# Altium PCB HighPowerBoard_v2.PcbDoc
Units mm, origin at the board's own origin, x right, y up, seen from the top; angles counter-clockwise.
Board outline 76.2 x 52.07 mm, 2 copper layers (Top Layer, Bottom Layer); 27 components, 11 nets, 63 pads, 29 vias.
Unrouted connection lines stored in the file: 16.
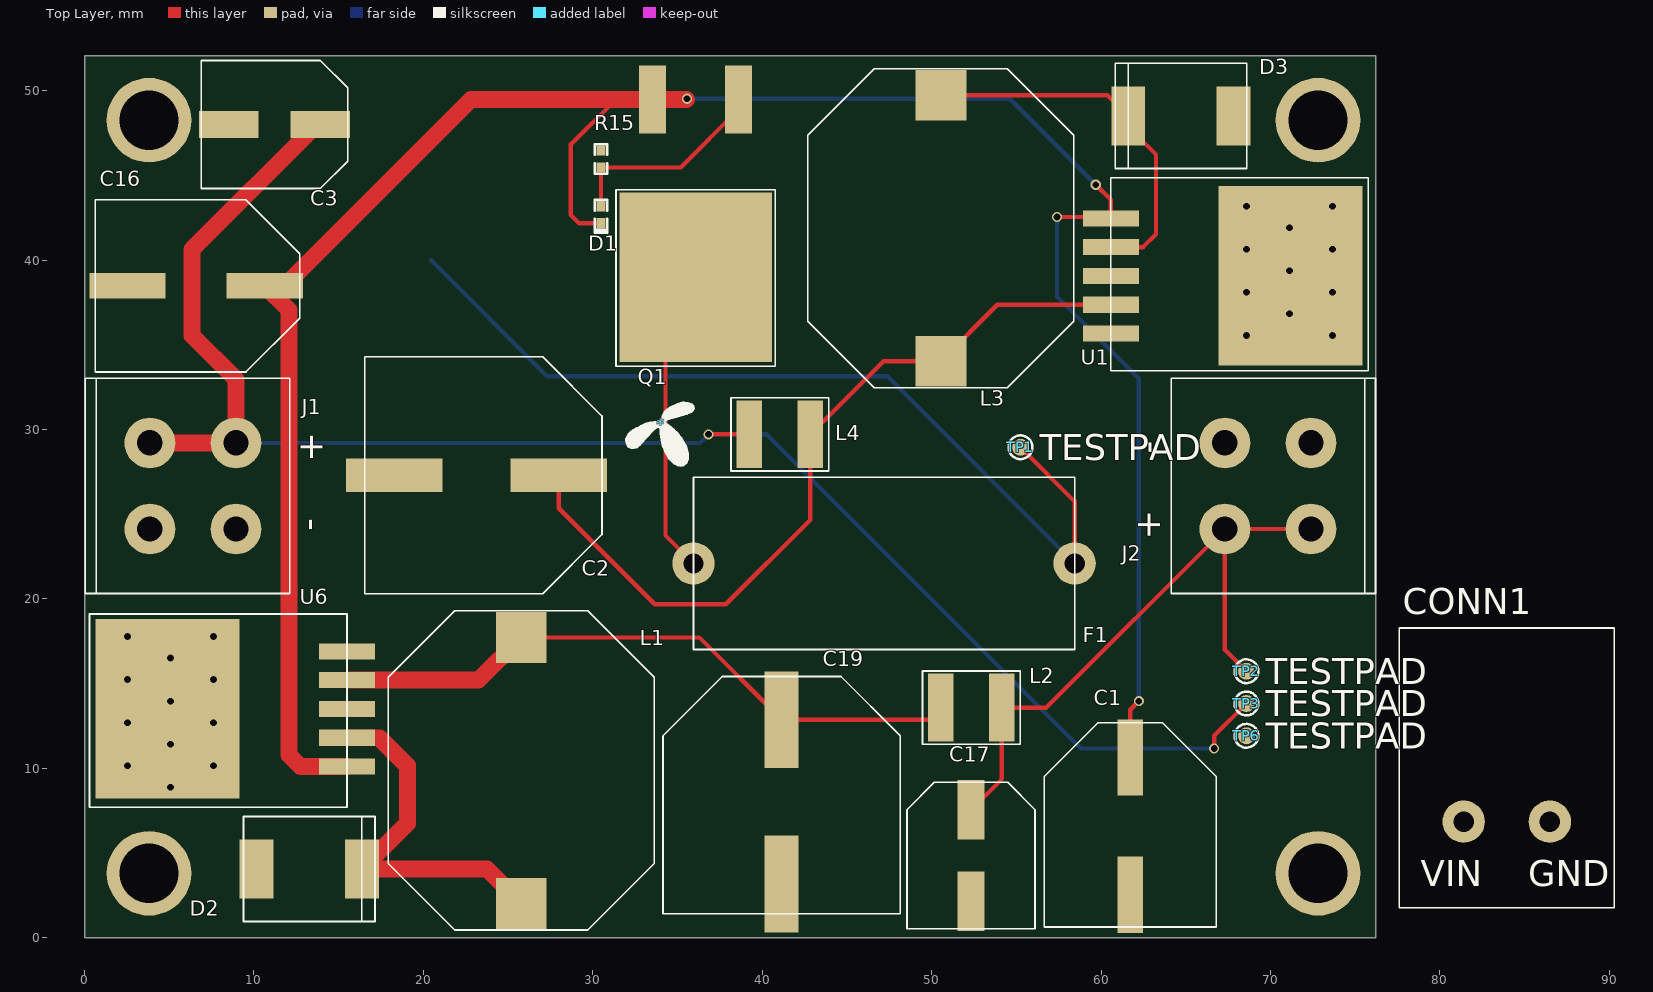
[diagram p0: Top Layer view]
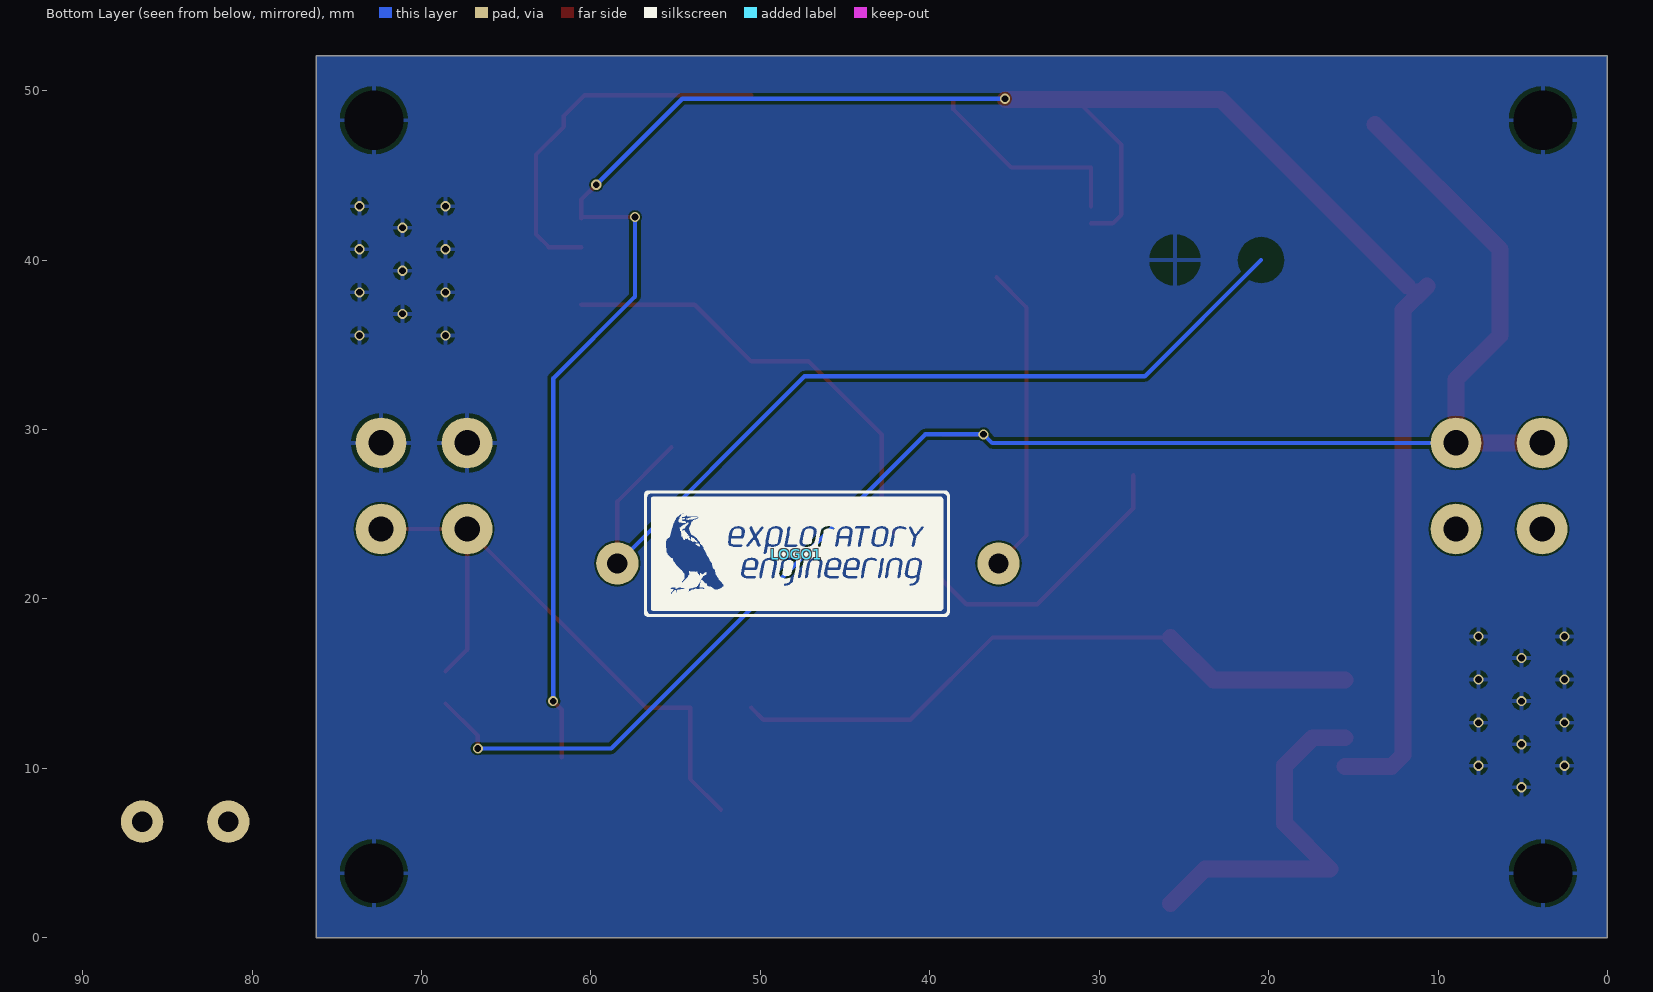
[diagram p1: Bottom Layer view, seen from below]

## Layer stack, top to bottom
Top Solder: solder mask 0.0102, Solder Resist, Dk 3.5
Top Layer: signal copper 0.0356
Dielectric 1: dielectric 0.32, FR-4, Dk 4.8
Bottom Layer: signal copper 0.0356
Bottom Solder: solder mask 0.0102, Solder Resist, Dk 3.5

## Board outline
0,0 76.2,0 76.2,52.07 0,52.07

## Design rules (kind name [scope] priority, off if disabled: settings)
Clearance [All] p1: gap=0.1 ignorepadtopadclearanceinfootprint=FALSE except(0.2: Arc-Arc Arc-Track Arc-SMDPad Arc-THPad Arc-Via Arc-Fill Arc-Poly Arc-Region Arc-Text Arc-Hole Track-Track Track-SMDPad Track-THPad Track-Via Track-Fill Track-Poly Track-Region Track-Text Track-Hole)
ComponentClearance [All] p1: gap=0.254 collisioncheckmode=3 verticalgap=0.1 showdistances=FALSE
HoleSize [All] p1: absolutevalues=TRUE maxlimit=4 minlimit=0.025 maxpercent=80.000 minpercent=20.000
MinimumSolderMaskSliver [All] p1: minsoldermaskwidth=0.1
PolygonConnect [All] p1: connectstyle=Relief reliefconductorwidth=0.254 reliefentries=4 polygonreliefangle="90 Angle" airgapwidth=0.254
RoutingVias [All] p1: holewidth=0.711 width=1.27 viastyle="Through Hole" minholewidth=0.711 minwidth=1.27 maxholewidth=0.711 maxwidth=1.27
SilkToSilkClearance [All] p1: silktosilkclearance=0.1
SilkToSolderMaskClearance [IsPad] p1: minsilkscreentomaskgap=0 clearancetoexposedcopper=TRUE
SolderMaskExpansion [All] p1: expansion=0.102
Width [All] p1: maxlimit=1 minlimit=0.254 preferedwidth=0.254
25 further rules are at their usual default settings.

## Components (designator, comment, footprint, x,y, rotation, side; value= is the part's Value field where it differs from the comment)
* "TELENOR_LOGO" TELENOR_4mmx3.8mm 34.036,30.353 r0 top
C1 "100uF" CAP_PANASONIC_SERIES_S_TYPE_V 61.722,2.54 r180 top
C2 "680uF 35V" CAP_ALU_PANASONIC_FK_H13 18.288,27.305 r90 top
C3 "100uF" INDUCTOR_UWX_100uF 13.909,48.006 r270 top
C16 "100uF" CAP_PANASONIC_SERIES_S_TYPE_V 2.54,38.481 r90 top
C17 "100uF" INDUCTOR_UWX_100uF 52.324,7.559 r0 top
C19 "680uF 35V" CAP_ALU_PANASONIC_FK_H13 41.148,3.175 r180 top
CONN1 "39532-1002" MOLEX_508_CONN_2P 81.407,6.858 r0 top
D1 "BZT52C10LP-7" "0402 Diode" 30.48,42.68 r270 top
D2 "RS3B-13-F" DIODE_DO-214AB 16.37,4.064 r180 top
D3 "RS3B-13-F" DIODE_DO-214AB 61.608,48.514 r0 top
F1 "65600001009" "5mm Fuse holder" 58.441,22.098 r180 top
J1 "1785942" PHOENIX_CONTACT_ICV2_5 6.401,26.67 r270 top
J2 "1785942" PHOENIX_CONTACT_ICV2_5 69.85,26.67 r90 top
L1 "330uH" INDUCTOR_PM5022 25.781,2.032 r90 top
L2 "22uH" INDUCTOR_NRS5020 50.546,13.589 r0 top
L3 "330uH" INDUCTOR_PM5022 50.546,49.736 r270 top
L4 "22uH" INDUCTOR_NRS5020 42.843,29.718 r180 top
LOGO1 "EE LOGO" EE_LOGO 47.879,22.606 r180 bottom
Q1 "FQB47P06TM_AM002" D2-PAK 38.608,49.489 r180 top
R15 "100k" RESC1005X04L 30.48,45.974 r90 top
TP1 "TESTPAD" TESTPAD 55.245,28.956 r0 top
TP2 "TESTPAD" TESTPAD 68.58,15.735 r0 top
TP3 "TESTPAD" TESTPAD 68.58,13.83 r0 top
TP6 "TESTPAD" TESTPAD 68.58,11.925 r0 top
U1 "TL2575HV-05IKTTR" KTT-TO-263-5 60.579,42.467 r270 top
U6 "TL2575HV-12IKTTR" KTT-TO-263-5 15.494,10.111 r90 top

## Footprints (in the part's own frame and the unit in brackets; to place one, negate y for a bottom-side part, rotate by r counter-clockwise, add the part's x,y. Pads: shape width x height; smd on the part's side, far side on the other; paste and mask are expansions set on the pad)
"5mm Fuse holder" [mm]
  round 2.5 hole 1.2: 1(0,0) 2(22.5,0)
  silkscreen extent 0,-5.08 22.5,5.08
"0402 Diode" [mm]
  rect 0.6x0.55 smd: A(-0.5,0) C(0.5,0)
  silkscreen extent -0.87,-0.4 1.1,0.4, body extent -0.5,-0.25 0.5,0.25, height 0.3
CAP_ALU_PANASONIC_FK_H13 [mm]
  rect 2x5.7 smd: +(0,-9.7) -(0,0)
  silkscreen extent -7,-12.25 7,1.75
CAP_PANASONIC_SERIES_S_TYPE_V [mm]
  rect 1.5x4.5 smd: +(0,-8.1) -(0,0)
  silkscreen extent -5.08,-10.16 5.08,1.91
D2-PAK [mm]
  rect 9x10 smd: D(2.54,10.5)
  rect 1.6x4 smd: G(0,0) S(5.08,0)
  silkscreen extent -2.16,5.33 7.24,15.75
DIODE_DO-214AB [mm]
  rect 2x3.5 smd: A(6.21,0) C(0,0)
  silkscreen extent -0.78,-3.1 6.98,3.1
EE_LOGO [mm] "Exploratory Engineering Logo"
  silkscreen extent -8.98,-3.65 9.05,3.74
INDUCTOR_NRS5020 [mm]
  rect 1.5x4 smd: 1(0,0) 2(3.6,0)
  silkscreen extent -1.08,-2.16 4.68,2.16
INDUCTOR_PM5022 [mm]
  rect 3x3 smd: 1(0,0) 2(15.7,0)
  silkscreen extent -1.57,-7.85 17.27,7.85
INDUCTOR_UWX_100uF [mm]
  rect 1.6x3.5 smd: +(0,0) -(0,-5.4)
  silkscreen extent -3.78,-7.02 3.78,1.62
KTT-TO-263-5 [mm]
  rect 0.95x3.3 smd: 1(0,0) 2(1.7,0) 3(3.4,0) 4(5.1,0) 5(6.8,0)
  rect 10.6x8.5 smd: 6(3.4,10.6)
  silkscreen extent -2.4,0 9,15.2
MOLEX_508_CONN_2P [mm]
  round 2.5 hole 1.2: 1(0,0) 2(5.08,0)
  silkscreen extent -3.81,-5.08 8.89,11.43
PHOENIX_CONTACT_ICV2_5 [mm]
  round 3 hole 1.5: 1(-2.54,2.54) 1(-2.54,-2.54) 2(2.54,2.54) 2(2.54,-2.54)
  silkscreen extent -6.35,-6.35 6.35,5.72
RESC1005X04L [mm]
  rect 0.6x0.55 smd: 1(-0.5,0) 2(0.5,0)
  silkscreen extent -0.87,-0.38 0.88,0.38, body extent -0.5,-0.25 0.5,0.25, height 0.3
TELENOR_4mmx3.8mm [mm] "Telenor Logo, 4mm x 3.8mm (W x H)"
  silkscreen extent -2.07,-2.5 1.93,1.26
TESTPAD [mm]
  round 1 smd paste-5: 1(0,0)
  silkscreen extent -0.7,-0.7 0.7,0.7

## Part data
C1 C16: library part EEE-1JA101P, "Cap Aluminum 100uF 63V 20% (10 X 10.2mm) SMD 60mA 2000h 85C T/R", Case/Package=Radial, Current Rating=1A, DC Resistance (DCR)=580mR, Dielectric Material=Aluminium, Inductance=330uH, Inductance Tolerance=10%, Leakage Current=63uA, Manufacturer=Panasonic, Max Operating Temperature=85°C, Min Operating Temperature=-40°C, Package Quantity=1, Ripple Current=60mA, Saturation Current=1.8A, Self Resonant Frequency=3.5MHz, Test Frequency=796kHz, Tolerance=20%, Voltage=63V, Capacitance=100uF, ComponentLink1Description=http://www.industrial.panasonic.com/www-data/pdf/ABA0000/ABA0000CE2.pdf?src-supplier=Avnet, ComponentLink1URL=http://www.industrial.panasonic.com/www-data/pdf/ABA0000/ABA0000CE2.pdf?src-supplier=Avnet, ComponentLink2Description=https://www.alliedelec.com/m/d/310b2cfd0553a89b5ffae819c6e32d0a.pdf?src-supplier=Allied+Electronics, ComponentLink2URL=https://www.alliedelec.com/m/d/310b2cfd0553a89b5ffae819c6e32d0a.pdf?src-supplier=Allied+Electronics, ComponentLink3Description=http://www.farnell.com/datasheets/2648708.pdf?src-supplier=Farnell, ComponentLink3URL=http://www.farnell.com/datasheets/2648708.pdf?src-supplier=Farnell, ComponentLink4Description=http://industrial.panasonic.com/www-data/pdf/ABA0000/ABA0000CE2.pdf?src-supplier=Future+Electronics, ComponentLink4URL=http://industrial.panasonic.com/www-data/pdf/ABA0000/ABA0000CE2.pdf?src-supplier=Future+Electronics, ComponentLink5Description=http://www.mouser.com/ds/2/315/ABA0000CE2-40801.pdf?src-supplier=Mouser, ComponentLink5URL=http://www.mouser.com/ds/2/315/ABA0000CE2-40801.pdf?src-supplier=Mouser, ComponentLink6Description=http://www.farnell.com/datasheets/1909355.pdf?src-supplier=Farnell, ComponentLink6URL=http://www.farnell.com/datasheets/1909355.pdf?src-supplier=Farnell, ComponentLink7Description=http://www.bourns.com/data/global/pdfs/pm5022_series.pdf?src-supplier=Farnell, ComponentLink7URL=http://www.bourns.com/data/global/pdfs/pm5022_series.pdf?src-supplier=Farnell, ComponentLink8Description=http://www.bourns.com/data/global/pdfs/pm5022_series.pdf?src-supplier=Avnet, ComponentLink8URL=http://www.bourns.com/data/global/pdfs/pm5022_series.pdf?src-supplier=Avnet, ComponentLink9Description=http://www.farnell.com/datasheets/1748024.pdf?src-supplier=Element14, ComponentLink9URL=http://www.farnell.com/datasheets/1748024.pdf?src-supplier=Element14, ComponentLink10Description=http://www.bourns.com/data/global/pdfs/pm5022_series.pdf?src-supplier=Element14, ComponentLink10URL=http://www.bourns.com/data/global/pdfs/pm5022_series.pdf?src-supplier=Element14, ComponentLink11Description=http://www.bourns.com/docs/Product-Datasheets/pm5022_series.pdf?src-supplier=Digi-Key, ComponentLink11URL=http://www.bourns.com/docs/Product-Datasheets/pm5022_series.pdf?src-supplier=Digi-Key, Composition=Wirewound, Contact Plating=Tin, Core Material=Ferrite, DC Current=1A, Depth=14.3mm, Diameter=10mm, Height=10.2mm, Height - Seated (Max)=0.402inch, Lead Free="Lead Free", Length=10.5mm, Life (Hours)=2000Hour, Manufacturer Part Number=EEE-1JA101P, Max DC Current=1A, Military Standard=Not, Mount="Surface Mount,PCB", Number of Pins=2, Packaging="Tape and Reel", Polarity=Polar, Pricing 1="1=0.62, 10=0.459, 100=0.3146 (USD)", Pricing 2="1=1.09, 10=1.009, 100=0.7297 (USD)", Q Factor=18, Radiation Hardening=No, REACH SVHC=Unknown, Ripple Current (AC)=60mA, RMS Current (Irms)=1A, Shielding=Unshielded, Stock 1=34754, Stock 2=2301, Supplier 1=Digi-Key, Supplier 2=Digi-Key, Termination=SMD/SMT, Voltage Rating=63V, Voltage Rating (DC)=63V, Width=14mm
C2 C19: library part EEVFK1V681Q, "CAP ALUM 680UF 20% 35V SMD"
C3 C17: library part UWX1C101MCL1GB, "CAP ALUM 100UF 20% 16V SMD"
CONN1: "Conn Shrouded Header (4 Sides) HDR 2 POS 5.08mm Solder RA Thru-Hole Eurostyle™", Color=Black, Current Rating=15A, Flammability Rating="UL94 V-0", Manufacturer=Molex, Max Operating Temperature=105°C, Max Voltage Rating (DC)=300.3kV, Min Operating Temperature=-40°C, Package Quantity=1240, Voltage Rating=300V, ComponentLink1Description=http://www.mouser.com/ds/2/276/0395321002_TERMINAL_BLOCKS-166037.pdf?src-supplier=Mouser, ComponentLink1URL=http://www.mouser.com/ds/2/276/0395321002_TERMINAL_BLOCKS-166037.pdf?src-supplier=Mouser, Connector Type="Terminal Block", Contact Material=Brass, Contact Plating=Tin, ELV=Compliant, Gender=Male, Housing Color=Black, Housing Material=Nylon, Lead Free="Lead Free", Length=12.2mm, Manufacturer Part Number=39532-1002, Mount="Through Hole", Number of Circuits=2, Number of Contacts=2, Number of Positions=2, Number of Rows=1, Orientation=Horizontal, Pitch=5.08mm, Pricing 1="1=0.54, 10=0.51, 100=0.391, 500=0.34, 1000=0.2805, 5000=0.2465, 10000=0.2295 (USD)", REACH SVHC=Unknown, Stock 1=7260, Supplier 1=Digi-Key, Termination=Solder, Width=12mm, Wire/Cable Gauge=12AWG
D1: "DIODE ZENER 10V 250MW 2DFN", Average Rectified Current=3A, Capacitance=50pF, Case/Package=DFN, Forward Voltage=900mV, Manufacturer=Diodes, Max Operating Temperature=150°C, Max Power Dissipation=250mW, Max Repetitive Reverse Voltage (Vrrm)=100V, Max Reverse Leakage Current=200nA, Max Surge Current=100A, Min Operating Temperature=-65°C, Output Current=50mA, Package Quantity=3000, Test Current=5mA, Tolerance=6%, Voltage Rating (DC)=10V, ComponentLink1Description=http://www.diodes.com/datasheets/ds30506.pdf?src-supplier=Avnet, ComponentLink1URL=http://www.diodes.com/datasheets/ds30506.pdf?src-supplier=Avnet, ComponentLink2Description=http://www.mouser.com/ds/2/115/ds30506-89295.pdf?src-supplier=Mouser, ComponentLink2URL=http://www.mouser.com/ds/2/115/ds30506-89295.pdf?src-supplier=Mouser, ComponentLink3Description=http://www.diodes.com//datasheets/ds15005.pdf?src-supplier=Avnet+Europe, ComponentLink3URL=http://www.diodes.com//datasheets/ds15005.pdf?src-supplier=Avnet+Europe, ComponentLink4Description=http://www.diodes.com/datasheets/ds15005.pdf?src-supplier=Future+Electronics, ComponentLink4URL=http://www.diodes.com/datasheets/ds15005.pdf?src-supplier=Future+Electronics, ComponentLink5Description=https://media.digikey.com/pdf/Data%20Sheets/Diodes%20PDFs/RS3A_B~RS3M_B.pdf?src-supplier=Digi-Key, ComponentLink5URL=https://media.digikey.com/pdf/Data%20Sheets/Diodes%20PDFs/RS3A_B~RS3M_B.pdf?src-supplier=Digi-Key, Contact Plating=Gold, Current Rating=3A, Element Configuration=Single, ESD Protection=No, Forward Current=3A, Height=0.47mm, Impedance=20R, Lead Free="Lead Free", Length=1mm, Manufacturer Part Number=BZT52C10LP-7, Max Reverse Voltage (DC)=100V, Mount="Surface Mount", Number of Pins=2, Packaging="Tape and Reel", Peak Non-Repetitive Surge Current=100A, Peak Reverse Current=200nA, Polarity=Standard, Power Dissipation=250mW, Power Rating=250mW, Pricing 1="1=0.44, 10=0.33, 100=0.1866, 500=0.1236, 1000=0.09476 (USD)", Pricing 2="1=0.5, 10=0.425, 100=0.3172, 500=0.24926, 1000=0.19261 (USD)", Radiation Hardening=No, Recovery Time=150ns, Reverse Recovery Time=150ns, Reverse Voltage (DC)=100V, Stock 1=51400, Stock 2=3931, Supplier 1=Digi-Key, Supplier 2=Digi-Key, Termination=SMD/SMT, Voltage Tolerance=6%, Weight=3.5E-05oz, Width=0.6mm, Working Voltage=10V, Zener Current=5mA, Zener Voltage=10V
D2 D3: "DIODE GEN PURP 100V 3A SMC"
F1: "FUSE BLOK CARTRIDGE 250V 10A PCB", Color=Black, Current Rating=10A, Manufacturer="Littelfuse Wickmann", Max Operating Temperature=85°C, Min Operating Temperature=-40°C, Package Quantity=100, Voltage=250V, Body Material=Thermoplastic, ComponentLink1Description=http://www.littelfuse.com/~/media/electronics/datasheets/fuse_blocks/littelfuse_fuse_block_656_datasheet.pdf.pdf?src-supplier=Digi-Key, ComponentLink1URL=http://www.littelfuse.com/~/media/electronics/datasheets/fuse_blocks/littelfuse_fuse_block_656_datasheet.pdf.pdf?src-supplier=Digi-Key, ComponentLink2Description=http://www.farnell.com/datasheets/1480080.pdf?src-supplier=Element14, ComponentLink2URL=http://www.farnell.com/datasheets/1480080.pdf?src-supplier=Element14, ComponentLink3Description=https://www.verical.com/server-webapp/html/getDatasheet?partID=221477&src-supplier=Verical, ComponentLink3URL=https://www.verical.com/server-webapp/html/getDatasheet?partID=221477&src-supplier=Verical, ComponentLink4Description=http://www.mouser.com/ds/2/240/656_659_660_LF_060102-16982.pdf?src-supplier=Mouser, ComponentLink4URL=http://www.mouser.com/ds/2/240/656_659_660_LF_060102-16982.pdf?src-supplier=Mouser, ComponentLink5Description=http://www.littelfuse.com/data/en/Data_Sheets/656_659_660_LF_060102.pdf?src-supplier=Future+Electronics, ComponentLink5URL=http://www.littelfuse.com/data/en/Data_Sheets/656_659_660_LF_060102.pdf?src-supplier=Future+Electronics, ComponentLink6Description=https://www.distrelec.biz/Web/Downloads/ta/_e/rl656-659-660_Data_E.pdf?mime=application%2Fpdf&src-supplier=Distrelec, ComponentLink6URL=https://www.distrelec.biz/Web/Downloads/ta/_e/rl656-659-660_Data_E.pdf?mime=application%2Fpdf&src-supplier=Distrelec, ComponentLink7Description=http://uk.rs-online.com/webdocs/128f/0900766b8128fb44.pdf?src-supplier=RSComponents, ComponentLink7URL=http://uk.rs-online.com/webdocs/128f/0900766b8128fb44.pdf?src-supplier=RSComponents, Contact Material=Tin, Depth=9.6mm, Fuse Current=10A, Illumination Type=Illuminated, Lead Free="Lead Free", Length=22.5mm, Manufacturer Part Number=65600001009, Material=Tin, Mount=Horizontal,PCB, Number of Circuits=1, Number of Pins=2, Number of Poles=1, Packaging=Bulk, Pricing 1="1=1.54, 5=1.488, 10=1.392, 50=1.152, 100=0.96, 250=0.936, 500=0.792, 1000=0.696, 5000=0.624 (USD)", REACH SVHC=Unknown, Stock 1=8926, Supplier 1=Digi-Key, Termination="PC Pin", Voltage Rating=250V, Voltage Rating (AC)=250V, Voltage Rating (DC)=250V
J1 J2: "TERM BLOCK HDR 2POS VERT 5.08MM", Color=Green, Current=10A, Current Rating=12A, Flammability Rating="UL94 V-0", Manufacturer="Phoenix Contact", Package Quantity=50, Voltage=300V, Voltage Rating=320V, Voltage Rating (DC)=250V, Approvals=UL,CSA,VDE,cULus,CB, ComponentLink1Description=https://www.verical.com/server-webapp/html/getDatasheet?partID=211511&src-supplier=Verical, ComponentLink1URL=https://www.verical.com/server-webapp/html/getDatasheet?partID=211511&src-supplier=Verical, ComponentLink2Description=http://uk.rs-online.com/webdocs/00b6/0900766b800b6097.pdf?src-supplier=RSComponents, ComponentLink2URL=http://uk.rs-online.com/webdocs/00b6/0900766b800b6097.pdf?src-supplier=RSComponents, ComponentLink3Description=https://media.digikey.com/pdf/Data%20Sheets/Phoenix%20Contact%20PDFs/1785942.pdf?src-supplier=Digi-Key, ComponentLink3URL=https://media.digikey.com/pdf/Data%20Sheets/Phoenix%20Contact%20PDFs/1785942.pdf?src-supplier=Digi-Key, ComponentLink4Description=https://produktinfo.conrad.com/datenblaetter/550000-574999/569318-da-01-en-GRUNDGEHAEUSE__1785942_50_ST.pdf?src-supplier=Conrad, ComponentLink4URL=https://produktinfo.conrad.com/datenblaetter/550000-574999/569318-da-01-en-GRUNDGEHAEUSE__1785942_50_ST.pdf?src-supplier=Conrad, ComponentLink5Description=https://media.digikey.com/pdf/Data%20Sheets/Phoenix%20Contact%20PDFs/1755736.pdf?src-supplier=Digi-Key, ComponentLink5URL=https://media.digikey.com/pdf/Data%20Sheets/Phoenix%20Contact%20PDFs/1755736.pdf?src-supplier=Digi-Key, ComponentLink6Description=http://components.arrow.com/part/dataview/43050509S3678952N1555?src-supplier=Arrow, ComponentLink6URL=http://components.arrow.com/part/dataview/43050509S3678952N1555?src-supplier=Arrow, ComponentLink7Description=https://www.verical.com/server-webapp/html/getDatasheet?partID=176344&src-supplier=Verical, ComponentLink7URL=https://www.verical.com/server-webapp/html/getDatasheet?partID=176344&src-supplier=Verical, ComponentLink8Description=http://www.farnell.com/datasheets/2309819.pdf?src-supplier=Element14, ComponentLink8URL=http://www.farnell.com/datasheets/2309819.pdf?src-supplier=Element14, ComponentLink9Description=https://www.alliedelec.com/m/d/3338eb046bc81454c8b99c2140a75853.pdf?src-supplier=Allied+Electronics, ComponentLink9URL=https://www.alliedelec.com/m/d/3338eb046bc81454c8b99c2140a75853.pdf?src-supplier=Allied+Electronics, ComponentLink10Description=https://produktinfo.conrad.com/datenblaetter/550000-574999/569804-da-01-en-GRUNDGEHAEUSE__1755736_250_ST.pdf?src-supplier=Conrad, ComponentLink10URL=https://produktinfo.conrad.com/datenblaetter/550000-574999/569804-da-01-en-GRUNDGEHAEUSE__1755736_250_ST.pdf?src-supplier=Conrad, ComponentLink11Description=http://www.todaycomponents.com/media/datasheet/1755736.pdf?src-supplier=Today+Components, ComponentLink11URL=http://www.todaycomponents.com/media/datasheet/1755736.pdf?src-supplier=Today+Components, Connector Type=Socket, Contact Material=Tin, Contact Plating=Tin, Depth=10.2mm, Gender=Male, Height=12.16mm, Housing Color=Green, Housing Material=Polyamide, Lead Free="Lead Free", Length=12.16mm, Manufacturer Part Number=1785942, Max Current Rating=12A, Mount="Through Hole", Number of Contacts=2, Number of Levels=1, Number of Poles=2, Number of Positions=2, Number of Positions Per Level=2, Number of Rows=1, Orientation=Straight, Packaging=Bulk, Pitch=5.08mm, Pricing 1="1=2.22, 10=2.157, 50=2.016, 100=1.8547, 250=1.7136, 500=1.63298, 1000=1.53217 (USD)", Pricing 2="1=0.64, 10=0.616, 50=0.589, 100=0.573, 250=0.53552, 500=0.49266, 1000=0.45518, 2500=0.43375, 5000=0.40698 (USD)", REACH SVHC=Unknown, Stock 1=531, Stock 2=10655, Supplier 1=Digi-Key, Supplier 2=Digi-Key, Supplier Part Number 2=277-1150-ND, Termination=Solder, Weight=5.820204oz, Width=22.6mm
L1 L3: library part PM5022-331M-RC, "INDUCTOR, UN-SHIELDED, 330UH, 1.8A, SMD, FULL REEL; Product Range:PM5022 Series; Inductance:330 H; Inductance Tolerance: 10%; Inductor Construction:Unshielded; DC Resistance Max:0.58ohm; RMS Current (Irms):1A; Packaging:Tape & Reel ;RoHS Compliant: Yes"
L2 L4: library part NRS5020T220MMGJ, "Inductor Power Shielded Wirewound 22uH 20% 100KHz Ferrite 1A 312mOhm DCR T/R", Capacitance=100uF, Case/Package=Radial, Dielectric Material=Aluminium, Leakage Current=3uA, Manufacturer=Nichicon, Manufacturer Part Number=UWX1C101MCL1GB, Max Operating Temperature=85°C, Min Operating Temperature=-40°C, Package Quantity=1, Ripple Current=86mA, Tolerance=20%, Voltage=16V, ComponentLink1Description=http://www.nichicon.co.jp/english/products/pdfs/e-ch_ref.pdf?src-supplier=Digi-Key, ComponentLink1URL=http://www.nichicon.co.jp/english/products/pdfs/e-ch_ref.pdf?src-supplier=Digi-Key, ComponentLink2Description=http://uk.rs-online.com/webdocs/13ec/0900766b813ecff4.pdf?src-supplier=RSComponents, ComponentLink2URL=http://uk.rs-online.com/webdocs/13ec/0900766b813ecff4.pdf?src-supplier=RSComponents, ComponentLink3Description=http://components.arrow.com/part/dataview/41714838S7371984N1432?src-supplier=Arrow, ComponentLink3URL=http://components.arrow.com/part/dataview/41714838S7371984N1432?src-supplier=Arrow, ComponentLink4Description=https://www.verical.com/server-webapp/html/getDatasheet?partID=110339&src-supplier=Verical, ComponentLink4URL=https://www.verical.com/server-webapp/html/getDatasheet?partID=110339&src-supplier=Verical, ComponentLink5Description=http://www.farnell.com/datasheets/59577.pdf?src-supplier=Element14, ComponentLink5URL=http://www.farnell.com/datasheets/59577.pdf?src-supplier=Element14, ComponentLink6Description=http://www.nichicon.co.jp/english/products/pdfs/e-wx.pdf?src-supplier=Avnet+Asia, ComponentLink6URL=http://www.nichicon.co.jp/english/products/pdfs/e-wx.pdf?src-supplier=Avnet+Asia, ComponentLink7Description=http://www.nichicon.co.jp/english/products/pdfs/e-wx.pdf?src-supplier=Avnet+Europe, ComponentLink7URL=http://www.nichicon.co.jp/english/products/pdfs/e-wx.pdf?src-supplier=Avnet+Europe, ComponentLink8Description=http://www.farnell.com/datasheets/1912851.pdf?src-supplier=Element14, ComponentLink8URL=http://www.farnell.com/datasheets/1912851.pdf?src-supplier=Element14, ComponentLink9Description=http://www.jameco.com/Jameco/Products/ProdDS/2012742.pdf?src-supplier=Jameco, ComponentLink9URL=http://www.jameco.com/Jameco/Products/ProdDS/2012742.pdf?src-supplier=Jameco, ComponentLink10Description=http://www.nichicon.co.jp/english/products/pdfs/e-wx.pdf?src-supplier=Avnet, ComponentLink10URL=http://www.nichicon.co.jp/english/products/pdfs/e-wx.pdf?src-supplier=Avnet, Contact Plating=Tin, Diameter=6.3mm, Dissipation Factor=0.16%, Height=5.5mm, Height - Seated (Max)=0.213inch, Lead Diameter=0.8mm, Lead Free="Lead Free", Lead Pitch=2.2mm, Length=5.4mm, Life (Hours)=2000Hour, Mount="Surface Mount", Number of Pins=2, Packaging="Tape and Reel", Pricing 1="1=0.29, 10=0.2, 100=0.1201, 500=0.09004 (USD)", Radiation Hardening=No, REACH SVHC="No SVHC", Ripple Current (AC)=86mA, Stock 1=281579, Supplier 1=Digi-Key, Termination=SMD/SMT, Voltage Rating=16V, Voltage Rating (DC)=16V, Width=6.6mm
LOGO1: library part EE-LOGO, "Exploratory Engineering Logo Silkscreen"
Q1: "MOSFET P-CH 60V 47A D2PAK", Case/Package=TO-263-3, Continuous Drain Current (ID)=47A, Drain to Source Voltage (Vdss)=60V, Input Capacitance=3.6nF, Manufacturer="ON Semiconductor", Max Operating Temperature=175°C, Max Power Dissipation=160W, Min Operating Temperature=-55°C, Manufacturer Part Number=FQB47P06TM_AM002, Mount="Surface Mount", Packaging="Cut Tape", Rds On Max=26mR, Stock 1=0, Supplier 1=Digi-Key
R15: library part RC0402FR-07100KL, "RES SMD 100K OHM 1% 1/16W 0402", Manufacturer=Yageo, Operating Temperature="-55°C ~ 155°C", Package / Case="0402 (1005 Metric)", Power (Watts)="0.063W, 1/16W", Supplier Device Package=0402, Supplier Part Number 1=311-100KLRDKR-ND, Temperature Coefficient=±100ppm/°C, Tolerance=±1%, Category=Resistors, ComponentLink1Description=http://www.yageo.com/NewPortal/yageodocoutput?fileName=/pdf/R-Chip/PYu-RC_Group_51_RoHS_L_3.pdf, ComponentLink1URL=http://www.yageo.com/NewPortal/yageodocoutput?fileName=/pdf/R-Chip/PYu-RC_Group_51_RoHS_L_3.pdf, Composition="Thick Film", Features="Moisture Resistant", Height="0.016\" (0.40mm)", Manufacturer Part Number=RC0402FR-07100KL, Number of Terminations=2, Packaging=Digi-Reel®, Pricing 1="1=0.1, 10=0.013, 25=0.0096, 100=0.0054, 250=0.00412, 500=0.00328, 1000=0.00242, 2500=0.0021, 5000=0.00173 (USD)", Resistance (Ohms)=100k, RoHS="RoHS Compliant", Size / Dimension="0.039\" L x 0.020\" W (1.00mm x 0.50mm)", Stock 1=3562762, Supplier 1=Digi-Key
U1: "IC REG BUCK 5V 1A 5-DDPAK", Case/Package=TO-263-5, Manufacturer="Texas Instruments", Max Input Voltage=60V, Max Operating Temperature=125°C, Max Output Current=1A, Max Output Voltage=5V, Min Input Voltage=4.75V, Min Operating Temperature=-40°C, Package Quantity=1, Quiescent Current=5mA, Switching Frequency=58kHz, ComponentLink1Description=https://www.verical.com/server-webapp/html/getDatasheet?partID=188276&src-supplier=Verical, ComponentLink1URL=https://www.verical.com/server-webapp/html/getDatasheet?partID=188276&src-supplier=Verical, ComponentLink2Description=http://www.farnell.com/datasheets/1874571.pdf?src-supplier=Element14, ComponentLink2URL=http://www.farnell.com/datasheets/1874571.pdf?src-supplier=Element14, ComponentLink3Description=http://www.farnell.com/datasheets/2008028.pdf?src-supplier=Element14, ComponentLink3URL=http://www.farnell.com/datasheets/2008028.pdf?src-supplier=Element14, ComponentLink4Description=http://www.ti.com/lit/ds/symlink/tl2575-12.pdf?src-supplier=Digi-Key, ComponentLink4URL=http://www.ti.com/lit/ds/symlink/tl2575-12.pdf?src-supplier=Digi-Key, ComponentLink5Description=http://focus.ti.com/lit/ds/symlink/tl2575-05.pdf?src-supplier=Avnet+Europe, ComponentLink5URL=http://focus.ti.com/lit/ds/symlink/tl2575-05.pdf?src-supplier=Avnet+Europe, Efficiency=77%, Height=4.83mm, Lead Free="Lead Free", Length=10.67mm, Manufacturer Part Number=TL2575HV-05IKTTR, Min Output Voltage=5V, Nominal Output Voltage=5V, Number of Outputs=1, Number of Pins=6, Operating Supply Voltage=60V, Output Current=1A, Output Type=Fixed,Adjustable, Output Voltage=5V, Packaging="Tape and Reel", Pricing 1="1=3.25, 10=2.92, 100=2.3921 (USD)", Radiation Hardening=No, REACH SVHC="No SVHC", Stock 1=11552, Supplier 1=Digi-Key, Synchronous Rectifier=No, Weight=0.056128oz, Width=9.65mm
U6: "IC REG BUCK 5V 1A 5-DDPAK", Case/Package=TO-263-5, Manufacturer="Texas Instruments", Manufacturer Part Number=TL2575HV-05IKTTR, Max Input Voltage=60V, Max Operating Temperature=125°C, Max Output Current=1A, Max Output Voltage=5V, Min Input Voltage=4.75V, Min Operating Temperature=-40°C, Package Quantity=1, Quiescent Current=5mA, Switching Frequency=58kHz, ComponentLink1Description=https://www.verical.com/server-webapp/html/getDatasheet?partID=188276&src-supplier=Verical, ComponentLink1URL=https://www.verical.com/server-webapp/html/getDatasheet?partID=188276&src-supplier=Verical, ComponentLink2Description=http://www.farnell.com/datasheets/1874571.pdf?src-supplier=Element14, ComponentLink2URL=http://www.farnell.com/datasheets/1874571.pdf?src-supplier=Element14, ComponentLink3Description=http://www.farnell.com/datasheets/2008028.pdf?src-supplier=Element14, ComponentLink3URL=http://www.farnell.com/datasheets/2008028.pdf?src-supplier=Element14, ComponentLink4Description=http://www.ti.com/lit/ds/symlink/tl2575-12.pdf?src-supplier=Digi-Key, ComponentLink4URL=http://www.ti.com/lit/ds/symlink/tl2575-12.pdf?src-supplier=Digi-Key, ComponentLink5Description=http://focus.ti.com/lit/ds/symlink/tl2575-05.pdf?src-supplier=Avnet+Europe, ComponentLink5URL=http://focus.ti.com/lit/ds/symlink/tl2575-05.pdf?src-supplier=Avnet+Europe, Efficiency=77%, Height=4.83mm, Lead Free="Lead Free", Length=10.67mm, Min Output Voltage=5V, Nominal Output Voltage=5V, Number of Outputs=1, Number of Pins=6, Operating Supply Voltage=60V, Output Current=1A, Output Type=Fixed,Adjustable, Output Voltage=5V, Packaging="Tape and Reel", Pricing 1="1=3.25, 10=2.92, 100=2.3921 (USD)", Radiation Hardening=No, REACH SVHC="No SVHC", Stock 1=11552, Supplier 1=Digi-Key, Synchronous Rectifier=No, Weight=0.056128oz, Width=9.65mm

## Free pads (board coordinates)
  round 5 / inner round 1.35 / far side round 1.35 hole 3.5: 44(3.81,3.81) 44(3.81,48.26) 44(72.81,3.81) 44(72.81,48.26)

## Via types
v1: diameter 0.6, hole 0.4, Top Layer to Bottom Layer, tented both sides, 29 vias

## Nets (pads, with @x,y where several pads share a name; then routed paths per layer and width w, separated by ;. In a path a pad name is that pad's centre, name@x,y a point inside that pad or via, vN(x,y) a via of type N, cw(c..) or ccw(c..) an arc to the next point about the centre after c; other vN are vias at no path point)
+5V: C3.+ J1.1 L4.2 TP3.1 | length 99.7
  Top Layer w0.254: C3.+@13.716,48.006 C3.+ ; v1(36.83,29.718) L4.2 ; v1(66.675,11.176) 66.675,11.925 TP3.1
  Top Layer w1: J1.1@3.861,29.21 8.941,29.21 8.941,32.969 6.35,35.56 6.35,40.64 C3.+@13.716,48.006
  Bottom Layer w0.254: J1.1@8.941,29.21 36.322,29.21 v1(36.83,29.718) 40.259,29.718 58.801,11.176 v1(66.675,11.176)
+12V: C17.+ J2.1 L2.2 TP2.1 | length 38.3
  Top Layer w0.254: C17.+ 54.146,9.381 L2.2 56.769,13.589 J2.1@67.31,24.13 ; TP2.1 67.31,17.005 J2.1@67.31,24.13 ; J2.1@72.39,24.13 J2.1@67.31,24.13
GND: C1.- C2.- C3.- C16.- C17.- C19.- CONN1.2 D2.A D3.A J2.2 pad.44 R15.2 TP6.1 U1.3 U1.5 U1.6 U6.3 U6.5 U6.6
  other v1: 5.08,8.89 2.54,10.16 7.62,10.16 5.08,11.43 2.54,12.7 7.62,12.7 5.08,13.97 2.54,15.24 7.62,15.24 5.08,16.51 2.54,17.78 7.62,17.78 68.58,35.56 73.66,35.56 71.12,36.83 68.58,38.1 73.66,38.1 71.12,39.37 68.58,40.64 73.66,40.64 71.12,41.91 68.58,43.18 73.66,43.18
NetC1_+: C1.+ C16.+ D1.C Q1.S U1.1 U6.1 | length 137.3
  Top Layer w0.254: C16.+ C16.+@11.811,38.481 ; D1.C 29.194,42.18 28.702,42.672 28.702,46.822 31.369,49.489 ; v1@35.519,49.489 v1(35.56,49.53) ; v1(57.404,42.545) 60.501,42.545 U1.1 60.579,43.561 v1(59.69,44.45) ; C1.+ 61.722,13.462 v1(62.23,13.97)
  Top Layer w1: C16.+ 12.065,37.056 12.065,10.795 12.749,10.111 U6.1 ; C16.+@11.811,38.481 22.819,49.489 31.369,49.489 Q1.S v1@35.519,49.489
  Bottom Layer w0.254: v1(35.56,49.53) 54.61,49.53 v1(59.69,44.45) ; v1(57.404,42.545) 57.404,37.846 62.23,33.02 v1(62.23,13.97)
NetC2_+: C2.+ L3.2 L4.1 U1.4 | length 47.2
  Top Layer w0.254: C2.+ 27.988,25.352 33.655,19.685 37.846,19.685 42.843,24.682 L4.1 47.161,34.036 L3.2 53.877,37.367 U1.4
NetC19_+: C19.+ L1.2 L2.1 U6.4 | length 38.4
  Top Layer w0.254: L1.2 36.291,17.732 C19.+ 49.832,12.875 L2.1
  Top Layer w1: U6.4 23.26,15.211 L1.2
NetD1_A: D1.A Q1.G R15.1 | length 12.4
  Top Layer w0.254: D1.A R15.1 35.187,45.474 38.608,48.895 Q1.G
NetD2_C: D2.C L1.1 U6.2 | length 21.7
  Top Layer w1: U6.2 17.399,11.811 19.05,10.16 19.05,6.744 D2.C 23.749,4.064 L1.1
NetD3_C: D3.C L3.1 U1.2 | length 22.2
  Top Layer w0.254: L3.1 60.386,49.736 D3.C 61.608,47.866 63.246,46.228 63.246,41.529 62.484,40.767 U1.2
NetF1_2: F1.2 Q1.D | length 18.3
  Top Layer w0.254: F1.2 34.29,23.749 34.29,37.211 Q1.D
VIN: CONN1.1 F1.1 TP1.1 | length 53.6
  Top Layer w0.254: TP1.1 58.441,25.76 F1.1
  Bottom Layer w0.254: 20.447,40.005 27.305,33.147 47.392,33.147 F1.1
pads on no net: J1.2

## Polygon pours and split planes (outlines as drawn)
GND on Bottom Layer "Bottom Layer-GND 1" (solid, pour order 6): 0,0 0,52.07 76.2,52.07 76.2,0

## Silkscreen, mask and mechanical layers (free items; w line width, h text height)
Mechanical 1:
  lines w0.1: -0.05,0 ccw(c0,0) 0,-0.05 ; -0.05,0 ccw(c0,0) 0,-0.05 ; -0.05,0 -0.05,52.07 ; -0.05,52.07 cw(c0,52.07) 0,52.12 ; -0.05,52.07 cw(c0,52.07) 0,52.12 ; 0,-0.05 76.2,-0.05 ; 0,52.12 76.2,52.12 ; 76.2,-0.05 ccw(c76.2,0) 76.25,0 ; 76.2,-0.05 ccw(c76.2,0) 76.25,0 ; 76.2,52.12 cw(c76.2,52.07) 76.25,52.07 ; 76.2,52.12 cw(c76.2,52.07) 76.25,52.07 ; 76.25,0 76.25,52.07

## Text inside footprints (layer, text, board x,y; h text height)
CONN1: Top Overlay "GND" at 85.217,3.048 h1.52; Top Overlay "VIN" at 78.867,3.048 h1.52
J1: Top Overlay "-" at 12.751,24.765 h1.52 r270; Top Overlay "+" at 12.751,29.845 h1.52 r270
J2: Top Overlay "-" at 63.5,28.575 h1.52 r90; Top Overlay "+" at 63.5,23.495 h1.52 r90